# Altium PCB NixiePSU.PcbDoc
Units mm, origin at the board's own origin, x right, y up, seen from the top; angles counter-clockwise.
Board outline 35 x 20 mm, 2 copper layers (Top Layer, Bottom Layer); 27 components, 15 nets, 66 pads, 19 vias.
Unrouted connection lines stored in the file: 10.
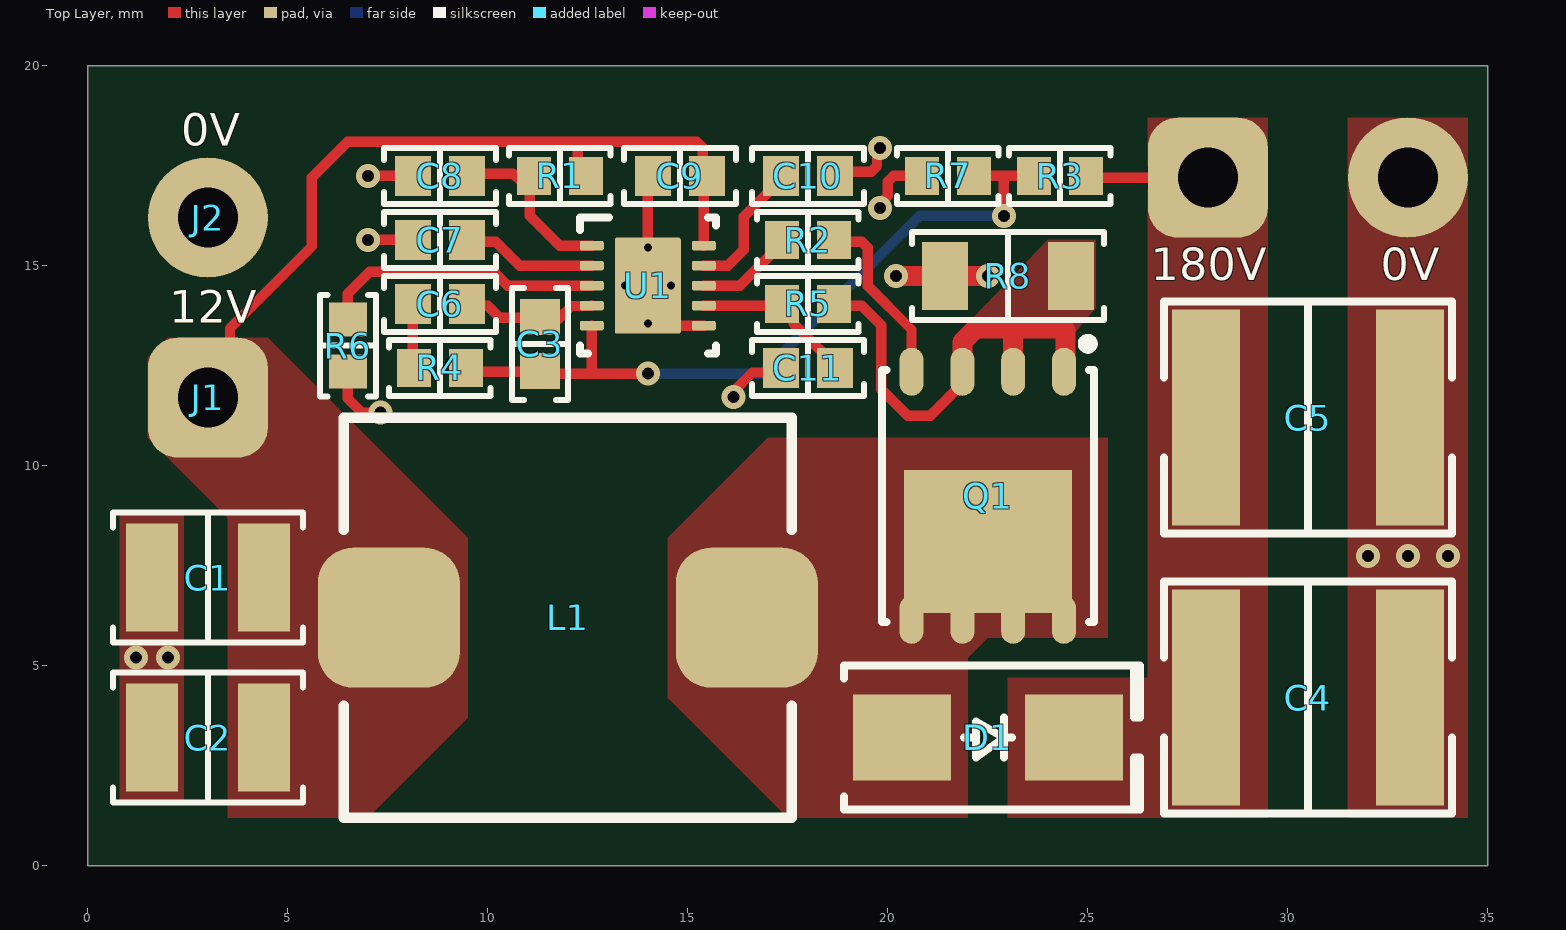
[diagram p0: Top Layer view]
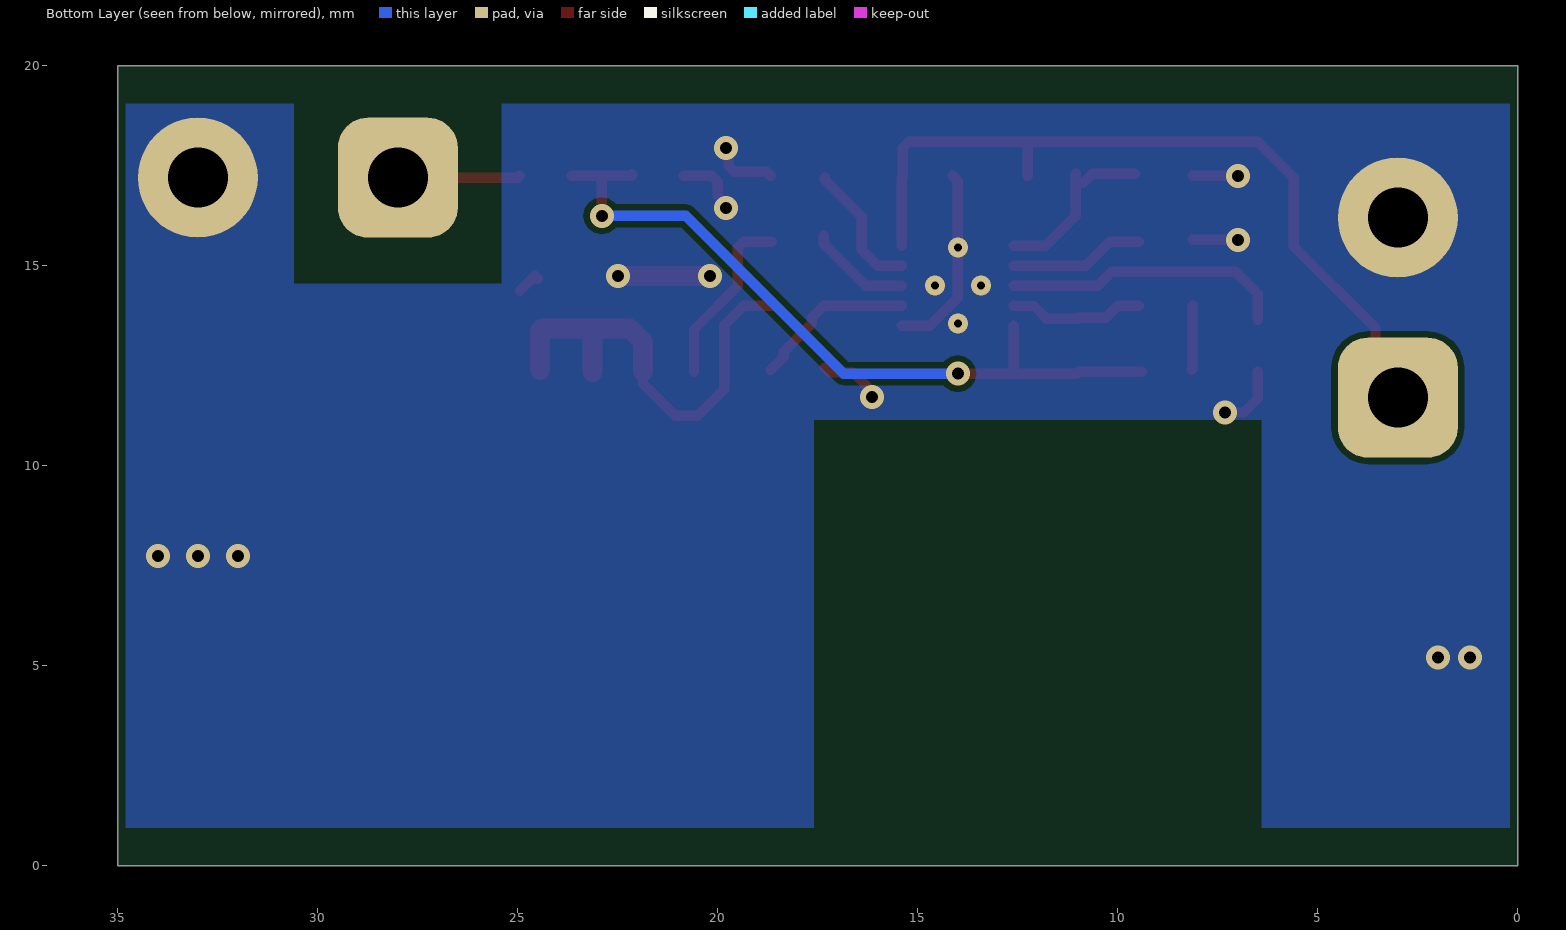
[diagram p1: Bottom Layer view, seen from below]
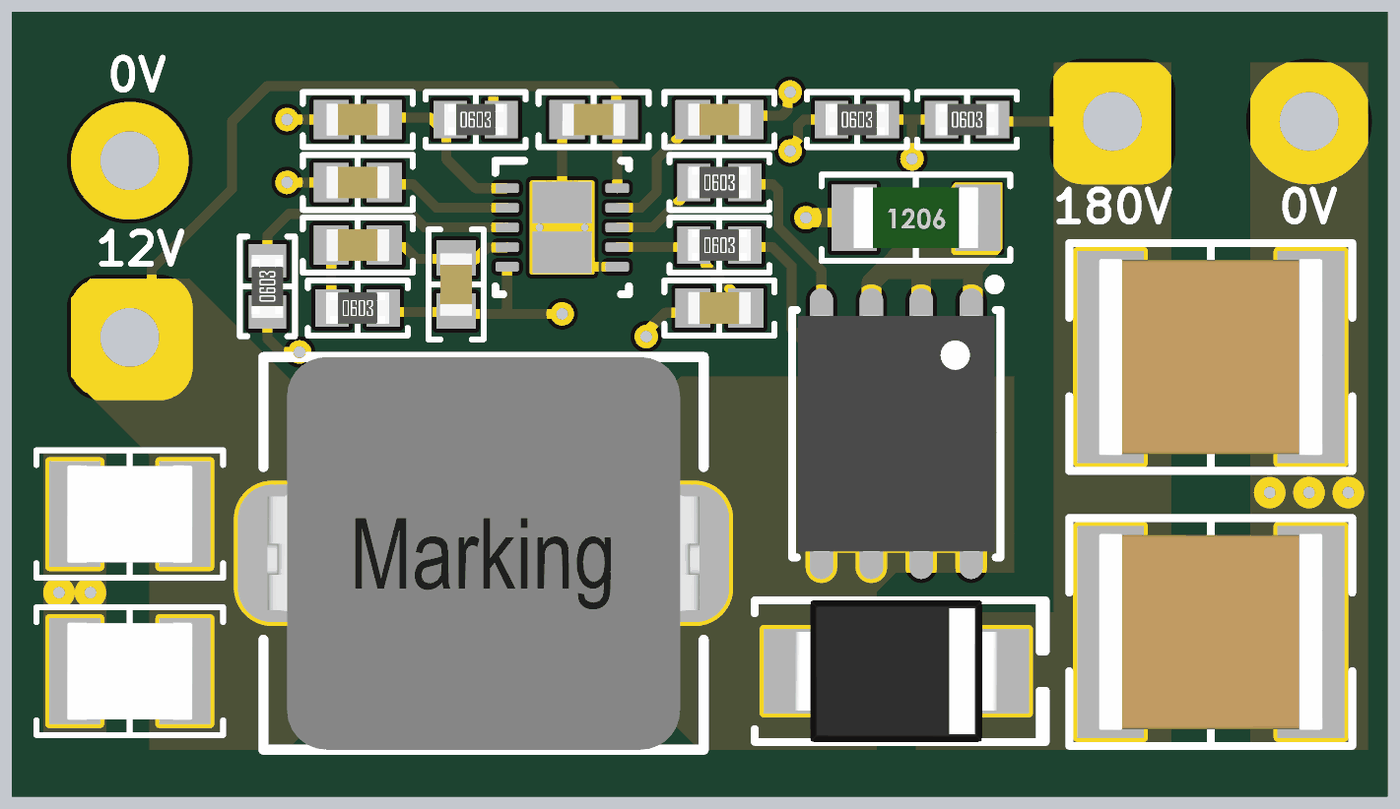
[diagram p2: 3D render of the assembled board from above, using the file's embedded part models]

## Layer stack, top to bottom
Top Solder: solder mask 0.0102, Solder Resist, Dk 3.5
Top Layer: signal copper 0.0356
Dielectric 1: dielectric 0.32, FR-4, Dk 4.8
Bottom Layer: signal copper 0.0356
Bottom Solder: solder mask 0.0102, Solder Resist, Dk 3.5

## Board outline
0,0 0,20 35,20 35,0

## Design rules (kind name [scope] priority, off if disabled: settings)
Clearance [All] p1: gap=0.152 ignorepadtopadclearanceinfootprint=FALSE
MinimumSolderMaskSliver [All] p1: minsoldermaskwidth=0.025
PolygonConnect [All] p1: connectstyle=Direct reliefconductorwidth=0.254 reliefentries=4 polygonreliefangle="90 Angle" airgapwidth=0.254
RoutingVias [All] p1: holewidth=0.711 width=1.27 viastyle="Through Hole" minholewidth=0.711 minwidth=1.27 maxholewidth=0.711 maxwidth=1.27
SilkToSolderMaskClearance [IsPad] p1: minsilkscreentomaskgap=0.025 clearancetoexposedcopper=TRUE
SolderMaskExpansion [All] p1: expansion=0.102 istentingtop=FALSE
Width [All] p1: maxlimit=3 minlimit=0.152 preferedwidth=0.254
28 further rules are at their usual default settings.

## Components (designator, comment, footprint, x,y, rotation, side; value= is the part's Value field where it differs from the comment)
0V "WIRE_CON-" WIRE_PAD- 33,17.202 r0 top (schematic designator J4)
180V "WIRE_CON+" WIRE_PAD+ 28,17.202 r0 top (schematic designator J3)
C1 "22µF" "CAP 1210_3225 - 2.8MM" 3,7.202 r0 top
C2 "22µF" "CAP 1210_3225 - 2.8MM" 3,3.202 r0 top
C3 "100pF" "CAP 0603_1608" 11.3,13.05 r90 top
C4 "1µF" "CAP 2220_5650 2.0MM" 30.5,4.202 r180 top
C5 "1µF" "CAP 2220_5650 2.0MM" 30.5,11.202 r180 top
C6 "0.15µF" "CAP 0603_1608" 8.8,14.05 r180 top
C7 "2.2µF" "CAP 0603_1608" 8.8,15.65 r0 top
C8 "470pF" "CAP 0603_1608" 8.8,17.25 r0 top
C9 "0.1µF" "CAP 0603_1608" 14.8,17.25 r0 top
C10 "1µF" "CAP 0603_1608" 18,17.25 r180 top
C11 "470pF" "CAP 0603_1608" 18,12.45 r0 top
D1 "ES2G-E3/52T" "DO214AA SMB" 22.5,3.202 r0 top
J1 "WIRE_CON+" WIRE_PAD+ 3,11.702 r0 top
J2 "WIRE_CON-" WIRE_PAD- 3,16.202 r0 top
L1 "47uH" SRP1040VA 12,6.202 r0 top
Q1 "IRFH5025PBF" QFN127P600X500X80_HS-9M 22.5,9.25 r270 top
R1 "620 kOhms" "RES 0603_1608" 11.8,17.25 r0 top
R2 "3.3 Ohms" "RES 0603_1608" 18,15.65 r0 top
R3 "330 kOhms" "RES 0603_1608" 24.3,17.25 r0 top
R4 "10 kOhms" "RES 0603_1608" 8.8,12.45 r0 top
R5 "1 kOhms" "RES 0603_1608" 18,14.05 r0 top
R6 "0 Ohms" "RES 0603_1608" 6.5,13.002 r90 top
R7 "1.27 kOhms" "RES 0603_1608" 21.5,17.25 r0 top
R8 "39 mOhms" "STACKPOLE CSR1206" 23,14.75 r0 top
U1 "TPS40210DRCT" DRC0010A_V 14,14.502 r0 top

## Footprints (in the part's own frame and the unit in brackets; to place one, negate y for a bottom-side part, rotate by r counter-clockwise, add the part's x,y. Pads: shape width x height; smd on the part's side, far side on the other; paste and mask are expansions set on the pad)
"CAP 0603_1608" [mm] "Chip Capacitor, 2-Leads, Body 1.60x0.80mm, IPC Medium Density"
  rect 0.9x1 smd: 1(-0.675,0) 2(0.675,0)
  silkscreen extent -1.4,-0.7 1.4,0.7, body extent -0.8,-0.41 0.8,0.41, height 0.82
"CAP 1210_3225 - 2.8MM" [mm] "Chip Capacitor, 2-Leads, Body 3.20x2.50mm, IPC Medium Density"
  rect 1.3x2.7 smd: 1(-1.4,0) 2(1.4,0)
  silkscreen extent -2.37,-1.63 2.37,1.63, body extent -1.6,-1.25 1.6,1.25, height 2.8
"CAP 2220_5650 2.0MM" [mm] "Chip Capacitor, 2-Leads, Body 5.70x5.00mm, IPC Medium Density"
  rect 1.7x5.4 smd: 1(-2.55,0) 2(2.55,0)
  silkscreen extent -3.6,-2.9 3.6,2.9, body extent -2.85,-2.5 2.85,2.5, height 2
"DO214AA SMB" [mm] "Molded Diode, 2-Leads, Body 4.31x3.62mm, IPC Medium Density"
  rect 2.45x2.15 smd: 1(-2.15,0) 2(2.15,0)
  silkscreen extent -3.6,-1.8 3.8,1.8, body extent -2.6,-1.8 2.6,1.8, height 2.4
DRC0010A_V [mm] "SON, 10-Leads, Body 3x3mm, Pitch 0.5mm, Thermal Pad 2.4x1.65mm, TI Recommended"
  rrect42% 0.6x0.24 smd: 1(-1.4,1) 2(-1.4,0.5) 3(-1.4,0) 4(-1.4,-0.5) 5(-1.4,-1) 6(1.4,-1) 7(1.4,-0.5) 8(1.4,0) 9(1.4,0.5) 10(1.4,1)
  rrect6% 1.65x2.4 smd paste-0.825: 11(0,0)
  silkscreen extent -1.7,-1.7 1.7,1.7, body extent -1.55,-1.55 1.55,1.55, height 1.01
QFN127P600X500X80_HS-9M [mm] "QFN, 8-Leads, Body 6.00x5.00mm, Pitch 1.27mm, Thermal Pad 3.58x4.20mm, IPC Low Density"
  oval 1.2x0.6 smd: 1(-3.1,1.905) 2(-3.1,0.635) 3(-3.1,-0.635) 4(-3.1,-1.905) 5(3.1,-1.905) 6(3.1,-0.635) 7(3.1,0.635) 8(3.1,1.905)
  rect 3.58x4.2 smd: 9(1.143,0)
  silkscreen extent -3.92,-2.65 3.15,2.65, body extent -3.01,-2.5 3.01,2.5, height 0.8
"RES 0603_1608" [mm] "Chip Resistor, 2-Leads, Body 1.60x0.80mm, IPC Medium Density"
  rect 0.85x0.95 smd: 1(-0.65,0) 2(0.65,0)
  silkscreen extent -1.27,-0.7 1.27,0.7, body extent -0.8,-0.4 0.8,0.4, height 0.45
SRP1040VA [mm]
  rrect50% 3.55x3.5 smd: 1(-4.475,0) 2(4.475,0)
  silkscreen extent -5.6,-5 5.6,5, body extent -5.5,-5 5.5,5, height 3.81
"STACKPOLE CSR1206" [mm] "Chip Resistor, 2-Leads, Body 3.13x1.55mm, IPC Medium Density"
  rect 1.15x1.7 smd: 1(-1.575,0) 2(1.575,0)
  silkscreen extent -2.4,-1.1 2.4,1.1, body extent -1.6,-0.78 1.6,0.77, height 0.55
WIRE_PAD+ [mm] "Wire connection pad +"
  rrect50% 3x3 hole 1.5: 1(0,0)
WIRE_PAD- [mm] "Wire connection pad +"
  round 3 hole 1.5: 1(0,0)

## Part data
0V 180V J1 J2: "Wire pad connection"
C1 C2: library part GRM32EC81E226KE15L, "CAP CER 22UF 25V X6S 1210", Part Number=GRM32EC81E226KE15L
C3: library part C0603C101K4GAC7867, "CAP CER 100PF 16V NP0 0603", Device Package="0603 (1608 Metric)", Manufacturer=KEMET, Operating Temperature="-55°C ~ 125°C", Supplier Part Number 1=399-17390-1-ND, Temperature Coefficient="C0G, NP0", Tolerance=±10%, Voltage - Rated=16V, Applications="General Purpose", Capacitance=100pF, ComponentLink1Description=Datasheet, ComponentLink1URL=https://api.kemet.com/component-edge/download/datasheet/C0603C101K4GACTU.pdf, ComponentLink2Description="DigiKey Link", ComponentLink2URL=http://digikey.com/product-detail/en/kemet/C0603C101K4GAC7867/399-17390-1-ND/8570357, Features="Low ESL", LastUpdated="21/01/2020 12:01:41 AM", Lifecycle Status=Active, Minimum Order=1, Mounting Type="Surface Mount, MLCC", Package / Case="0603 (1608 Metric)", Packaging=TapeAndReel, PartId=16900, Part Number=C0603C101K4GAC7867, Part Status=Active, Price=0.05, Series="SMD Comm C0G", Size / Dimension="0.063\" L x 0.031\" W (1.60mm x 0.80mm)", Supplier 1=DigiKey, Thickness (Max)="0.034\" (0.87mm)"
C4 C5: library part C2220C105KARACTU, "CAP CER 1UF 250V X7R 2220", Device Package="2220 (5750 Metric)", Manufacturer=KEMET, Operating Temperature="-55°C ~ 125°C", Supplier Part Number 1=399-4690-1-ND, Temperature Coefficient=X7R, Tolerance=±10%, Voltage - Rated=250V, Applications="General Purpose", Capacitance=1µF, ComponentLink1Description=Datasheet, ComponentLink1URL=https://api.kemet.com/component-edge/download/datasheet/C2220C105KARACTU.pdf, ComponentLink2Description="DigiKey Link", ComponentLink2URL=http://digikey.com/product-detail/en/kemet/C2220C105KARACTU/399-4690-1-ND/992215, LastUpdated="21/01/2020 12:34:33 AM", Lifecycle Status=Active, Minimum Order=1, Mounting Type="Surface Mount, MLCC", Package / Case="2220 (5750 Metric)", Packaging=TapeAndReel, Part Number=C2220C105KARACTU, Part Status=Active, Price=0.87, Series="SMD Comm X7R Tip-Ring", Size / Dimension="0.224\" L x 0.197\" W (5.70mm x 5.00mm)", Supplier 1=DigiKey, Thickness (Max)="0.065\" (1.65mm)"
C6: library part CC0603KRX7R7BB154, "CAP CER 0.15UF 16V X7R 0603", Device Package="0603 (1608 Metric)", Manufacturer=Yageo, Operating Temperature="-55°C ~ 125°C", Supplier Part Number 1=311-1799-1-ND, Temperature Coefficient=X7R, Tolerance=±10%, Voltage - Rated=16V, Applications="General Purpose", Capacitance=0.15µF, ComponentLink1Description=Datasheet, ComponentLink1URL=https://www.yageo.com/upload/media/product/productsearch/datasheet/mlcc/UPY-GPHC_X7R_6.3V-to-50V_18.pdf, ComponentLink2Description="DigiKey Link", ComponentLink2URL=http://digikey.com/product-detail/en/yageo/CC0603KRX7R7BB154/311-1799-1-ND/5195701, LastUpdated="21/01/2020 12:02:09 AM", Lifecycle Status=Active, Minimum Order=1, Mounting Type="Surface Mount, MLCC", Package / Case="0603 (1608 Metric)", Packaging=TapeAndReel, PartId=2211, Part Number=CC0603KRX7R7BB154, Part Status=Active, Price=0.02, Series=CC, Size / Dimension="0.063\" L x 0.031\" W (1.60mm x 0.80mm)", Supplier 1=DigiKey, Thickness (Max)="0.035\" (0.90mm)"
C7: library part GRM188R61H225KE11D, "CAP CER 2.2UF 50V X5R 0603", Part Number=GRM188R61H225KE11D
C8 C11: library part CGJ3E2C0G1H471J080AA, "CAP CER 470PF 50V C0G 0603", Part Number=CGJ3E2C0G1H471J080AA
C9: library part C0603C104K3PAC7867, "CAP CER 0.1UF 25V X5R 0603", Device Package="0603 (1608 Metric)", Manufacturer=KEMET, Operating Temperature="-55°C ~ 85°C", Supplier Part Number 1=399-14940-1-ND, Temperature Coefficient=X5R, Tolerance=±10%, Voltage - Rated=25V, Applications="General Purpose", Capacitance=0.1µF, ComponentLink1Description=Datasheet, ComponentLink1URL=https://api.kemet.com/component-edge/download/datasheet/C0603C104K3PAC7867.pdf, ComponentLink2Description="DigiKey Link", ComponentLink2URL=http://digikey.com/product-detail/en/kemet/C0603C104K3PAC7867/399-14940-1-ND/7382489, LastUpdated="21/01/2020 12:01:53 AM", Lifecycle Status=Active, Minimum Order=1, Mounting Type="Surface Mount, MLCC", Package / Case="0603 (1608 Metric)", Packaging=TapeAndReel, PartId=12657, Part Number=C0603C104K3PAC7867, Part Status=Active, Price=0.07, Series="SMD Comm X5R", Size / Dimension="0.063\" L x 0.031\" W (1.60mm x 0.80mm)", Supplier 1=DigiKey, Thickness (Max)="0.035\" (0.90mm)"
C10: library part CGJ3E1X7R1E105K080AC, "CAP CER 1UF 25V X7R 0603", Device Package="0603 (1608 Metric)", Manufacturer="TDK Corporation", Operating Temperature="-55°C ~ 125°C", Ratings=AEC-Q200, Supplier Part Number 1=445-13311-1-ND, Temperature Coefficient=X7R, Tolerance=±10%, Voltage - Rated=25V, Applications=Automotive, Capacitance=1µF, ComponentLink1Description=Datasheet, ComponentLink1URL=https://product.tdk.com/info/en/catalog/datasheets/mlcc_highreliability_general_en.pdf?ref_disty=digikey, ComponentLink2Description="DigiKey Link", ComponentLink2URL=http://digikey.com/product-detail/en/tdk-corporation/CGJ3E1X7R1E105K080AC/445-13311-1-ND/3954977, LastUpdated="21/01/2020 12:02:09 AM", Lifecycle Status=Active, Minimum Order=1, Mounting Type="Surface Mount, MLCC", Package / Case="0603 (1608 Metric)", Packaging=TapeAndReel, PartId=2643, Part Number=CGJ3E1X7R1E105K080AC, Part Status=Active, Price=0.10, Series=CGJ, Size / Dimension="0.063\" L x 0.031\" W (1.60mm x 0.80mm)", Supplier 1=DigiKey, Thickness (Max)="0.031\" (0.80mm)"
D1: "DIODE GEN PURP 400V 2A DO214AA", Capacitance @ Vr, F="15pF @ 4V, 1MHz", Current - Average Rectified (Io)=2A, Current - Reverse Leakage @ Vr="10µA @ 400V", Device Package="DO-214AA, SMB", Manufacturer="Vishay Semiconductor Diodes Division", Operating Temperature - Junction="-55°C ~ 150°C", Supplier Device Package="DO-214AA (SMB)", Supplier Part Number 1=ES2G-E3/52TGICT-ND, Voltage - DC Reverse (Vr) (Max)=400V, Voltage - Forward (Vf) (Max) @ If="1.1V @ 2A", ComponentLink1Description=Datasheet, ComponentLink1URL=http://www.vishay.com/docs/88588/es2f.pdf, ComponentLink2Description="DigiKey Link", ComponentLink2URL=http://digikey.com/product-detail/en/vishay-semiconductor-diodes-division/ES2G-E3-52T/ES2G-E3-52TGICT-ND/1091576, Diode Type=Standard, LastUpdated="21/01/2020 2:37:13 AM", Lifecycle Status=Active, Minimum Order=1, Mounting Type="Surface Mount", Package / Case="DO-214AA, SMB", Packaging=TapeAndReel, PartId=235, Part Number=ES2G-E3/52T, Part Status=Active, Price=0.20, Reverse Recovery Time (trr)=50ns, Series=-, Speed="Fast Recovery =< 500ns, > 200mA (Io)", Supplier 1=DigiKey
L1: library part SRP1040VA-470M, "FIXED IND 47UH 4A 167MOHM SMD", Current - Saturation=4.5A, Current Rating (Amps)=4A, DC Resistance (DCR)=167mOhm, Supplier Part Number 1=118-SRP1040VA-470MCT-ND, ComponentLink1Description=Datasheet, ComponentLink1URL=https://www.bourns.com/docs/product-datasheets/srp1040va.pdf?sfvrsn=d53f46f6_2, Height - Seated (Max)=4mm, Supplier 1=DigiKey
Q1: library part "IRFH5025PBF N Channel FET", "IRFH5025TRPBF -  MOSFET Transistor, N Channel, 25 A, 250 V, 0.084 ohm, 10 V, 5 V"
R1: library part ERJ-3EKF6203V, "RES SMD 620K OHM 1% 1/10W 0603", Part Number=ERJ-3EKF6203V
R2: library part ERJ-3RQF3R3V, "RES SMD 3.3 OHM 1% 1/10W 0603", Device Package="0603 (1608 Metric)", Manufacturer="Panasonic Electronic Components", Operating Temperature="-55°C ~ 125°C", Power (Watts)="0.1W, 1/10W", Ratings=AEC-Q200, Supplier Device Package=0603, Supplier Part Number 1=P3.3AJCT-ND, Temperature Coefficient=±200ppm/°C, Tolerance=±1%, ComponentLink1Description=Datasheet, ComponentLink1URL=https://industrial.panasonic.com/cdbs/www-data/pdf/RDN0000/AOA0000C313.pdf, ComponentLink2Description="DigiKey Link", ComponentLink2URL=http://digikey.com/product-detail/en/panasonic-electronic-components/ERJ-3RQF3R3V/P3.3AJCT-ND/308116, Composition="Thick Film", Features="Automotive AEC-Q200, Current Sense", Height - Seated (Max)="0.022\" (0.55mm)", LastUpdated="21/01/2020 12:21:04 AM", Lifecycle Status=Active, Minimum Order=1, Number of Terminations=2, Package / Case="0603 (1608 Metric)", Packaging=TapeAndReel, PartId=14563, Part Number=ERJ-3RQF3R3V, Part Status=Active, Price=0.02, Resistance="3.3 Ohms", Series=ERJ, Size / Dimension="0.063\" L x 0.031\" W (1.60mm x 0.80mm)", Supplier 1=DigiKey
R3: library part ERJ-3EKF3303V, "RES SMD 330K OHM 1% 1/10W 0603", Device Package="0603 (1608 Metric)", Manufacturer="Panasonic Electronic Components", Operating Temperature="-55°C ~ 155°C", Power (Watts)="0.1W, 1/10W", Ratings=AEC-Q200, Supplier Device Package=0603, Supplier Part Number 1=P330KHCT-ND, Temperature Coefficient=±100ppm/°C, Tolerance=±1%, ComponentLink1Description=Datasheet, ComponentLink1URL=https://industrial.panasonic.com/cdbs/www-data/pdf/RDA0000/AOA0000C304.pdf, ComponentLink2Description="DigiKey Link", ComponentLink2URL=http://digikey.com/product-detail/en/panasonic-electronic-components/ERJ-3EKF3303V/P330KHCT-ND/1746764, Composition="Thick Film", Features="Automotive AEC-Q200", Height - Seated (Max)="0.022\" (0.55mm)", LastUpdated="21/01/2020 12:17:17 AM", Lifecycle Status=Active, Minimum Order=1, Number of Terminations=2, Package / Case="0603 (1608 Metric)", Packaging=TapeAndReel, PartId=23057, Part Number=ERJ-3EKF3303V, Part Status=Active, Price=0.01, Resistance="330 kOhms", Series=ERJ, Size / Dimension="0.063\" L x 0.031\" W (1.60mm x 0.80mm)", Supplier 1=DigiKey
R4: library part ERJ-3EKF1002V, "RES SMD 10K OHM 1% 1/10W 0603", Device Package="0603 (1608 Metric)", Manufacturer="Panasonic Electronic Components", Operating Temperature="-55°C ~ 155°C", Power (Watts)="0.1W, 1/10W", Ratings=AEC-Q200, Supplier Device Package=0603, Supplier Part Number 1=P10.0KHCT-ND, Temperature Coefficient=±100ppm/°C, Tolerance=±1%, ComponentLink1Description=Datasheet, ComponentLink1URL=https://industrial.panasonic.com/cdbs/www-data/pdf/RDA0000/AOA0000C304.pdf, ComponentLink2Description="DigiKey Link", ComponentLink2URL=http://digikey.com/product-detail/en/panasonic-electronic-components/ERJ-3EKF1002V/P10.0KHCT-ND/198102, Composition="Thick Film", Features="Automotive AEC-Q200", Height - Seated (Max)="0.022\" (0.55mm)", LastUpdated="21/01/2020 12:14:57 AM", Lifecycle Status=Active, Minimum Order=1, Number of Terminations=2, Package / Case="0603 (1608 Metric)", Packaging=TapeAndReel, PartId=25695, Part Number=ERJ-3EKF1002V, Part Status=Active, Price=0.01, Resistance="10 kOhms", Series=ERJ, Size / Dimension="0.063\" L x 0.031\" W (1.60mm x 0.80mm)", Supplier 1=DigiKey
R5: library part ERJ-3EKF1001V, "RES SMD 1K OHM 1% 1/10W 0603", Device Package="0603 (1608 Metric)", Manufacturer="Panasonic Electronic Components", Operating Temperature="-55°C ~ 155°C", Power (Watts)="0.1W, 1/10W", Ratings=AEC-Q200, Supplier Device Package=0603, Supplier Part Number 1=P1.00KHCT-ND, Temperature Coefficient=±100ppm/°C, Tolerance=±1%, ComponentLink1Description=Datasheet, ComponentLink1URL=https://industrial.panasonic.com/cdbs/www-data/pdf/RDA0000/AOA0000C304.pdf, ComponentLink2Description="DigiKey Link", ComponentLink2URL=http://digikey.com/product-detail/en/panasonic-electronic-components/ERJ-3EKF1001V/P1.00KHCT-ND/198071, Composition="Thick Film", Features="Automotive AEC-Q200", Height - Seated (Max)="0.022\" (0.55mm)", LastUpdated="21/01/2020 12:14:57 AM", Lifecycle Status=Active, Minimum Order=1, Number of Terminations=2, Package / Case="0603 (1608 Metric)", Packaging=TapeAndReel, PartId=25687, Part Number=ERJ-3EKF1001V, Part Status=Active, Price=0.01, Resistance="1 kOhms", Series=ERJ, Size / Dimension="0.063\" L x 0.031\" W (1.60mm x 0.80mm)", Supplier 1=DigiKey
R6: library part CR0603-J/-000EAS, "RES 0 OHM JUMPER 0.01W 0603", Part Number=CR0603-J/-000EAS
R7: library part ERJ-3EKF1271V, "RES SMD 1.27K OHM 1% 1/10W 0603", Device Package="0603 (1608 Metric)", Manufacturer="Panasonic Electronic Components", Operating Temperature="-55°C ~ 155°C", Power (Watts)="0.1W, 1/10W", Ratings=AEC-Q200, Supplier Device Package=0603, Supplier Part Number 1=P1.27KHCT-ND, Temperature Coefficient=±100ppm/°C, Tolerance=±1%, ComponentLink1Description=Datasheet, ComponentLink1URL=https://industrial.panasonic.com/cdbs/www-data/pdf/RDA0000/AOA0000C304.pdf, ComponentLink2Description="DigiKey Link", ComponentLink2URL=http://digikey.com/product-detail/en/panasonic-electronic-components/ERJ-3EKF1271V/P1.27KHCT-ND/198081, Composition="Thick Film", Features="Automotive AEC-Q200", Height - Seated (Max)="0.022\" (0.55mm)", LastUpdated="21/01/2020 12:16:20 AM", Lifecycle Status=Active, Minimum Order=1, Number of Terminations=2, Package / Case="0603 (1608 Metric)", Packaging=TapeAndReel, PartId=24158, Part Number=ERJ-3EKF1271V, Part Status=Active, Price=0.01, Resistance="1.27 kOhms", Series=ERJ, Size / Dimension="0.063\" L x 0.031\" W (1.60mm x 0.80mm)", Supplier 1=DigiKey
R8: library part ERJ-8BWFR039V, "RES 0.039 OHM 1% 1W 1206", Device Package="1206 (3216 Metric)", Manufacturer="Panasonic Electronic Components", Operating Temperature="-55°C ~ 155°C", Power (Watts)=1W, Ratings=AEC-Q200, Supplier Device Package=1206, Supplier Part Number 1=P.039AUCT-ND, Temperature Coefficient=±150ppm/°C, Tolerance=±1%, ComponentLink1Description=Datasheet, ComponentLink1URL=https://industrial.panasonic.com/cdbs/www-data/pdf/RDN0000/AOA0000C313.pdf, ComponentLink2Description="DigiKey Link", ComponentLink2URL=http://digikey.com/product-detail/en/panasonic-electronic-components/ERJ-8BWFR039V/P.039AUCT-ND/1711696, Composition="Thick Film", Features="Automotive AEC-Q200, Current Sense", Height - Seated (Max)="0.030\" (0.75mm)", LastUpdated="21/01/2020 2:21:17 AM", Lifecycle Status=Active, Minimum Order=1, Number of Terminations=2, Package / Case="1206 (3216 Metric)", Packaging=TapeAndReel, Part Number=ERJ-8BWFR039V, Part Status=Active, PartId=2160, Price=0.21, Resistance="39 mOhms", Series=ERJ, Size / Dimension="0.126\" L x 0.063\" W (3.20mm x 1.60mm)", Supplier 1=DigiKey
U1: library part CMP-0342-00149-2, "Wide Input Range Current Mode Boost Controller, 95 % Duty Cycle, 4.5 to 52 V, -40 to 125 degC, 10-pin SON (DRC), Green (RoHS & no Sb/Br)", Manufacturer="Texas Instruments", Switching Frequency(Max)(kHz)=1000, ComponentLink1Description=Datasheet, ComponentLink1URL=http://www.ti.com/general/docs/lit/getliterature.tsp?genericPartNumber=TPS40210&fileType=pdf, ComponentLink2Description="Package Specification", ComponentLink2URL=http://www.ti.com/litv/pdf/mpds117k, DatasheetVersion=SLUS772E, Duty Cycle(Max)(%)=95, Eco-Plan="Green (RoHS & no Sb/Br)", Iout(Max)(A)=6, Mounting Technology="Surface Mount", PackageDescription="10-Pin Plastic Small Outline No-Lead, 3 x 3 x 1 mm Body, 0.5 mm Pitch, Exposed Pad", PackageReference=DRC0010A, PackageVersion="revL, Sep-2011", PartNumber=TPS40210DRCT, Regulated Outputs(#)=1, SubFamily="Step-Up Controller", Topology=Boost, Vin(Max)(V)=52, Vin(Min)(V)=4.5, Vout(Max)(V)=260, Vout(Min)(V)=5

## Via types
v1: diameter 0.6, hole 0.3, Top Layer to Bottom Layer, 15 vias
v2: diameter 0.5, hole 0.2, Top Layer to Bottom Layer, 4 vias

## Nets (pads, with @x,y where several pads share a name; then routed paths per layer and width w, separated by ;. In a path a pad name is that pad's centre, name@x,y a point inside that pad or via, vN(x,y) a via of type N, cw(c..) or ccw(c..) an arc to the next point about the centre after c; other vN are vias at no path point)
0V: 0V.1 C1.1 C2.1 C4.1 C5.1 C7.1 C8.1 C9.1 C10.1 C11.1 J2.1 R6.1 R7.1 R8.1 U1.6 U1.11 | length 15.8
  Top Layer w0.254: R6.1 6.5,11.68 6.85,11.33 v1(7.32,11.33) ; v1(7,15.65) C7.1 ; v1(7,17.25) C8.1 ; C9.1@14,17.077 U1.11 14,14.2 14.698,13.502 U1.6 ; C9.1@14,17.125 C9.1 ; v1(16.139,11.723) 16.139,11.85 16.62,12.331 17.206,12.331 C11.1 ; C10.1 18.775,17.35 19.585,17.35 19.734,17.499 19.734,17.884 v1(19.8,17.95) ; v1(19.8,16.45) 19.8,16.544 20,16.744 20,17.101 20.149,17.25 R7.1
  Top Layer w0.5: v1(20.2,14.75) R8.1 v1(22.5,14.75)
  other v1: 1.2,5.202 2,5.202 32,7.75 33,7.75 34,7.75
  other v2: 14,13.552 13.425,14.502 14.575,14.502 14,15.452
12V: C1.2 C2.2 C9.2 J1.1 L1.1 R1.2 U1.10 | length 20
  Top Layer w0.254: J1.1 3.555,12.257 3.555,13.435 5.6,15.48 5.6,17.202 6.5,18.102 12.25,18.102 15.226,18.102 15.375,17.954 15.375,17.202 15.4,17.177 U1.10 ; R1.2@12.25,17.25 12.25,18
180V: 180V.1 C4.2 C5.2 D1.2 R3.2 | length 3.2
  Top Layer w0.254: R3.2 24.998,17.202 180V.1 180V.1@27.9,17.302
NetC6_2: C6.2 R4.1 | length 1.6
  Top Layer w0.254: C6.2@8.125,14.002 8.125,12.427 R4.1@8.15,12.402
NetQ1_1: Q1.1 Q1.2 Q1.3 R5.2 R8.2 | length 12.2
  Top Layer w0.152: R8.2@24.6,14.775 R8.2@24.64,14.735
  Top Layer w0.254: R5.2@18.65,14.002 19.349,14.002 19.839,13.512 19.839,11.911 20.5,11.25 21.065,11.25 21.865,12.05 Q1.3 Q1.3@21.87,12.355 ; 24.398,13.435 24.448,13.385 ; Q1.1 Q1.1@24.448,12.393 ; R8.2@24.5,14.675 R8.2 R8.2@24.948,14.377
  Top Layer w0.5: Q1.3@21.87,12.355 21.87,12.42 21.87,13.1 22.205,13.435 23.135,13.435 ; Q1.2 23.135,13.435 ; 24.398,13.435 23.135,13.435 ; Q1.1@24.448,12.393 24.448,13.385
NetQ1_4: Q1.4 R2.2 | length 4.5
  Top Layer w0.254: R2.2@18.65,15.602 19.351,15.602 19.5,15.454 19.5,14.502 20.595,13.407 Q1.4
PSU_180V_ISNS: C11.2 R5.1 U1.7 | length 4.1
  Top Layer w0.254: U1.7 17.35,14.002 17.648,13.704 17.648,13.554 18.352,12.85 18.352,12.725 C11.2@18.675,12.402
PSU_180V_nEN: R6.2 U1.3 | length 7.1
  Top Layer w0.254: R6.2 6.5,14.302 7.048,14.85 10.152,14.85 10.5,14.502 U1.3
PSU_180V_RC: C8.2 R1.1 U1.1 | length 4.3
  Top Layer w0.254: C8.2@9.575,17.302 10.634,17.302 R1.1@10.867,17.069 ; R1.1@11.05,17.302 11.05,16.252 11.8,15.502 U1.1
PSU_180V_SS: C7.2 U1.2 | length 3.4
  Top Layer w0.254: C7.2@9.475,15.602 10.2,15.602 10.8,15.002 U1.2
PSU_BP: C10.2 U1.9 | length 3.3
  Top Layer w0.254: U1.9 16,15.002 16.4,15.402 16.4,16.227 17.325,17.152 C10.2@17.325,17.202
PSU_COMP: C3.2 C6.1 U1.4 | length 3.4
  Top Layer w0.254: C6.1@9.475,14.002 10,14.002 10.3,13.702 10.975,13.702 11,13.677 11.775,13.677 12.093,13.995 12.593,13.995 U1.4
PSU_FB: C3.1 R3.1 R4.2 R7.2 U1.5 | length 18.9
  Top Layer w0.254: R4.2@9.4,12.352 10.975,12.352 11.025,12.302 12.512,12.302 ; U1.5 12.6,12.39 12.512,12.302 ; v1(14,12.302) 12.512,12.302 ; R7.2@22.129,17.277 R7.2@22.15,17.298 ; R7.2 22.9,17.25 ; v1(22.9,16.25) 22.9,17.25 ; R3.1 22.9,17.25
  Bottom Layer w0.254: v1(14,12.302) 16.852,12.302 20.8,16.25 v1(22.9,16.25)
PSU_GDRV: R2.1 U1.8 | length 2.5
  Top Layer w0.254: U1.8 16.3,14.502 17.35,15.552 R2.1@17.35,15.602 ; R2.1 R2.1@17.35,15.75
PSU_SW_HIGH: D1.1 L1.2 Q1.5 Q1.6 Q1.7 Q1.8 Q1.9

## Polygon pours and split planes (outlines as drawn)
PSU_SW_HIGH on Top Layer "PSU_SW_HIGH_L01_P001" (solid, pour order 1): 14.5,8.202 17,10.702 25.5,10.702 25.5,5.702 22.5,5.702 22,5.202 22,1.202 17.5,1.202 14.5,4.202
180V on Top Layer "180V_L01_P002" (solid, pour order 2): 23,4.702 23,1.202 29.5,1.202 29.5,18.702 26.5,18.702 26.5,4.702
0V on Top Layer "0V_L01_P003" (solid, pour order 3): 31.5,18.702 31.5,1.202 34.5,1.202 34.5,18.702
12V on Top Layer "12V_L01_P004" (solid, pour order 4): 9.5,8.202 9.5,3.702 7,1.202 3.5,1.202 3.5,8.702 1.5,10.702 1.5,12.702 2,13.202 4.5,13.202
0V on Top Layer "0V_L01_P008" (solid, pour order 8): 2.4,8.802 2.4,1.602 0.8,1.602 0.8,8.802
no net on Top Layer "NONET_L01_P011" (solid, pour order 11): 0.2,19.05
NetQ1_1 on Top Layer "NETQ1_1_L01_P016" (solid, pour order 16): 24,15.65 21.8,13.35 24.7,13.35 25.2,13.95 25.2,15.65
0V on Bottom Layer "GROUND_BOTTOM" (solid, pour order 12): 0.2,0.95 0.2,19.05 25.4,19.05 25.4,14.55 30.6,14.55 30.6,19.05 34.8,19.05 34.8,0.95 17.6,0.95 17.6,11.15 6.4,11.15 6.4,0.95

## Silkscreen, mask and mechanical layers (free items; w line width, h text height)
Top Overlay:
  text "0V" at 2.342,18.002 h0.81
  text "12V" at 2.042,13.572 h0.81
Mechanical 1:
  the board outline again, w0.254